# EAGLE board tinkercad multimeter arduino (EAGLE 9.7.0)

Size 308.24 x 121.88 mm. Coordinates in mm from the lower left corner, seen from the top.
Outline: 0,0 308.24,0 308.24,121.88 0,121.88 0,0
Copper layers (1*16): Top 0.035mm / dielectric 1.5mm / Bottom 0.035mm
Design rules "default": minimum track width 6mil, minimum drill 0.35mm, track to track 6mil, track to pad 6mil, pad to pad 6mil, via to via 6mil, smd to smd 6mil, copper to edge 40mil, drill to drill 6mil, minimum pad ring 10mil, minimum via ring 8mil, stop-mask expansion 4mil, vias tented up to drill 0mil, thermal gap 10mil

## Footprints (pad centres in the part's own frame; a part is rotated, then mirrored left to right if it is on the bottom)
BATTERY-GENERIC = drill 1.118 pad 3.15 octagon: + 2.54,0; - -2.54,0
LEDRD254W60D565H860B = drill 0.981 pad 1.581: 1 -1.27,0; 2 1.27,0
PIEZO = drill 1 pad 1.6: 1 -3.5,0; 2 3.5,0
RESAD1016W63L850D250B = drill 0.83 pad 1.43: 1 -5.08,0; 2 5.08,0
HA-06-SM065 = drill 1 pad 1.676: 1 -2.54,-2.54; 2 0,2.54; 3 2.54,-2.54
SWITCH-MOMENTARY-PTH-6.5MM = drill 1.016 pad 1.88: 1 -3.251,2.261; 2 3.251,2.261; 3 -3.251,-2.261; 4 3.251,-2.261
LCD-I2C = drill 1.016 long: 1 -19.05,-5.08; 2 -19.05,-7.62; 3 -19.05,-10.16; 4 -19.05,-12.7
ARDUINO-UNO-R3-SHIELD = drill 1.016 pad 1.88: 3.3V 24.13,-2.54; 5V 24.13,0; A0 24.13,12.7; A1 24.13,15.24; A2 24.13,17.78; A3 24.13,20.32; A4 24.13,22.86; A5 24.13,25.4; AREF -24.13,-13.97; D2 -24.13,20.32; D3 -24.13,17.78; D4 -24.13,15.24; D5 -24.13,12.7; D6 -24.13,10.16; D7 -24.13,7.62; D8 -24.13,3.81; D9 -24.13,1.27; D10 -24.13,-1.27; D11 -24.13,-3.81; D12 -24.13,-6.35; D13 -24.13,-8.89; GND@0 24.13,2.54; GND@1 24.13,5.08; GND@2 -24.13,-11.43; IOREF 24.13,-7.62; NC 24.13,-10.16; RES 24.13,-5.08; RX -24.13,25.4; SCL -24.13,-19.05; SDA -24.13,-16.51; TX -24.13,22.86; VIN 24.13,7.62

## Placement (x,y rotation side)
BAT1  9V  [BATTERY-GENERIC]  69.25,8.26 90 top
D1  RED  [LEDRD254W60D565H860B]  218.78,60.62 0 top
P1  BATTERYGENERIC  [BATTERY-GENERIC]  8.26,26.62 180 top
PIEZO1  PIEZO  [PIEZO]  110.5,108.3 0 top
R1  1k  [RESAD1016W63L850D250B]  209.66,60.06 0 top
R10K  10k  [RESAD1016W63L850D250B]  98.13,10.01 180 top
R10K_2  10k  [RESAD1016W63L850D250B]  200.3,6.85 180 top
R39K  39k  [RESAD1016W63L850D250B]  146.16,9.75 0 top
RPOT3  250k  [HA-06-SM065]  81.33,24.19 0 top
RRREF  1k  [RESAD1016W63L850D250B]  235.49,6.64 0 top
SCONTINUITY  SWITCH_MOMENTARY  [SWITCH-MOMENTARY-PTH-6.5MM]  174.5,113.8 90 top
SRESISTANCE  SWITCH_MOMENTARY  [SWITCH-MOMENTARY-PTH-6.5MM]  161.44,114.13 90 top
SVALUE_HOLD  SWITCH_MOMENTARY  [SWITCH-MOMENTARY-PTH-6.5MM]  183.74,114.24 90 top
SVOLTAGE  SWITCH_MOMENTARY  [SWITCH-MOMENTARY-PTH-6.5MM]  152.56,114.45 90 top
U1  LCD-16X2-I2CSUNFOUNDER-IIC  [LCD-I2C]  252.61,110.06 0 top
UUNO  ARDUINO-UNO-R3-SHIELD  [ARDUINO-UNO-R3-SHIELD]  146.1,74.66 270 top

## Library data of the parts
BAT1 P1 PIEZO1 R1 R10K R10K_2 R39K RPOT3 RRREF SCONTINUITY SRESISTANCE SVALUE_HOLD SVOLTAGE U1 UUNO = Tinkercad
D1 = Tinkercad; CATEGORY: Opto-Electronic; SUB-CATEGORY: LED; VALUE: LED_RED

## Nets
BAT1+: BAT1.+ RPOT3.1
BAT1-: BAT1.- D1.2 PIEZO1.2 R39K.2 RRREF.2 SCONTINUITY.1 SRESISTANCE.1 SVALUE_HOLD.1 SVOLTAGE.1 U1.1 UUNO.A1 UUNO.GND@0 UUNO.GND@1 UUNO.GND@2
D1_A: D1.1 R1.2
RPOT3_P$2: R10K.2 RPOT3.2
RRREF_1: R10K_2.1 RRREF.1
UUNO_5V: R10K_2.2 U1.2 UUNO.5V
UUNO_A0: R10K.1 R39K.1 UUNO.A0
UUNO_A4: U1.3 UUNO.A4
UUNO_A5: U1.4 UUNO.A5
UUNO_D2: SVOLTAGE.3 UUNO.D2
UUNO_D3: SRESISTANCE.3 UUNO.D3
UUNO_D4: SCONTINUITY.3 UUNO.D4
UUNO_D5: SVALUE_HOLD.3 UUNO.D5
UUNO_D6: PIEZO1.1 UUNO.D6
UUNO_D7: R1.1 UUNO.D7

## Tracks (layer width: path | path; a pad name or v marks a point on that pad's centre or on a via)
BAT1+  (1 unrouted)
BAT1-  (13 unrouted)
D1_A  (1 unrouted)
RPOT3_P$2  (1 unrouted)
RRREF_1  (1 unrouted)
UUNO_5V  (2 unrouted)
UUNO_A0  (2 unrouted)
UUNO_A4  (1 unrouted)
UUNO_A5  (1 unrouted)
UUNO_D2  (1 unrouted)
UUNO_D3  (1 unrouted)
UUNO_D4  (1 unrouted)
UUNO_D5  (1 unrouted)
UUNO_D6  (1 unrouted)
UUNO_D7  (1 unrouted)